# Altium PCB PMS_board.PcbDoc
Units mm, origin at the board's own origin, x right, y up, seen from the top; angles counter-clockwise.
Board outline 135 x 155 mm, 2 copper layers (Top Layer, Bottom Layer), stack 1.671 mm thick; 128 components, 74 nets, 436 pads, 62 vias.
Unrouted connection lines stored in the file: 1.
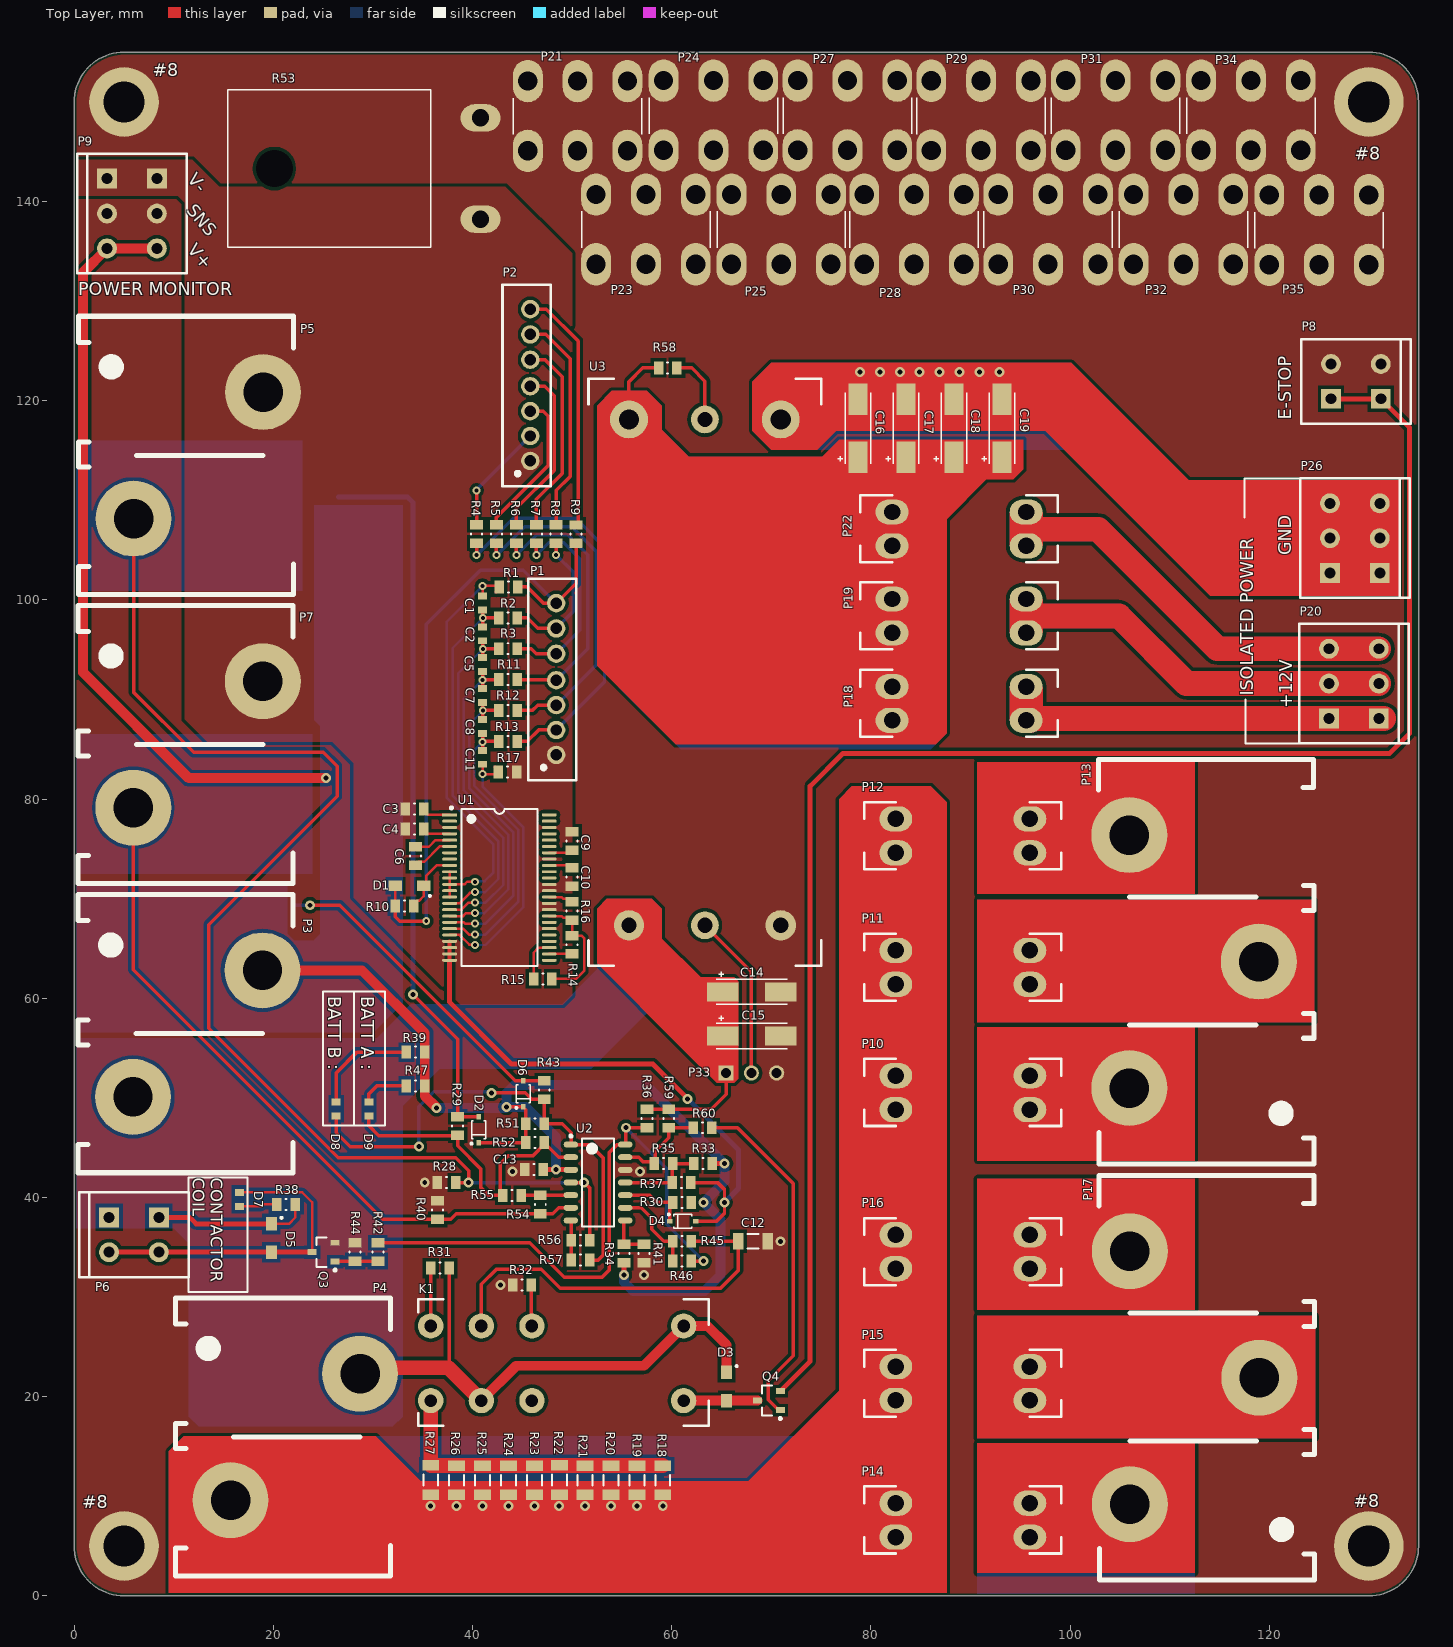
[diagram p0: Top Layer view]
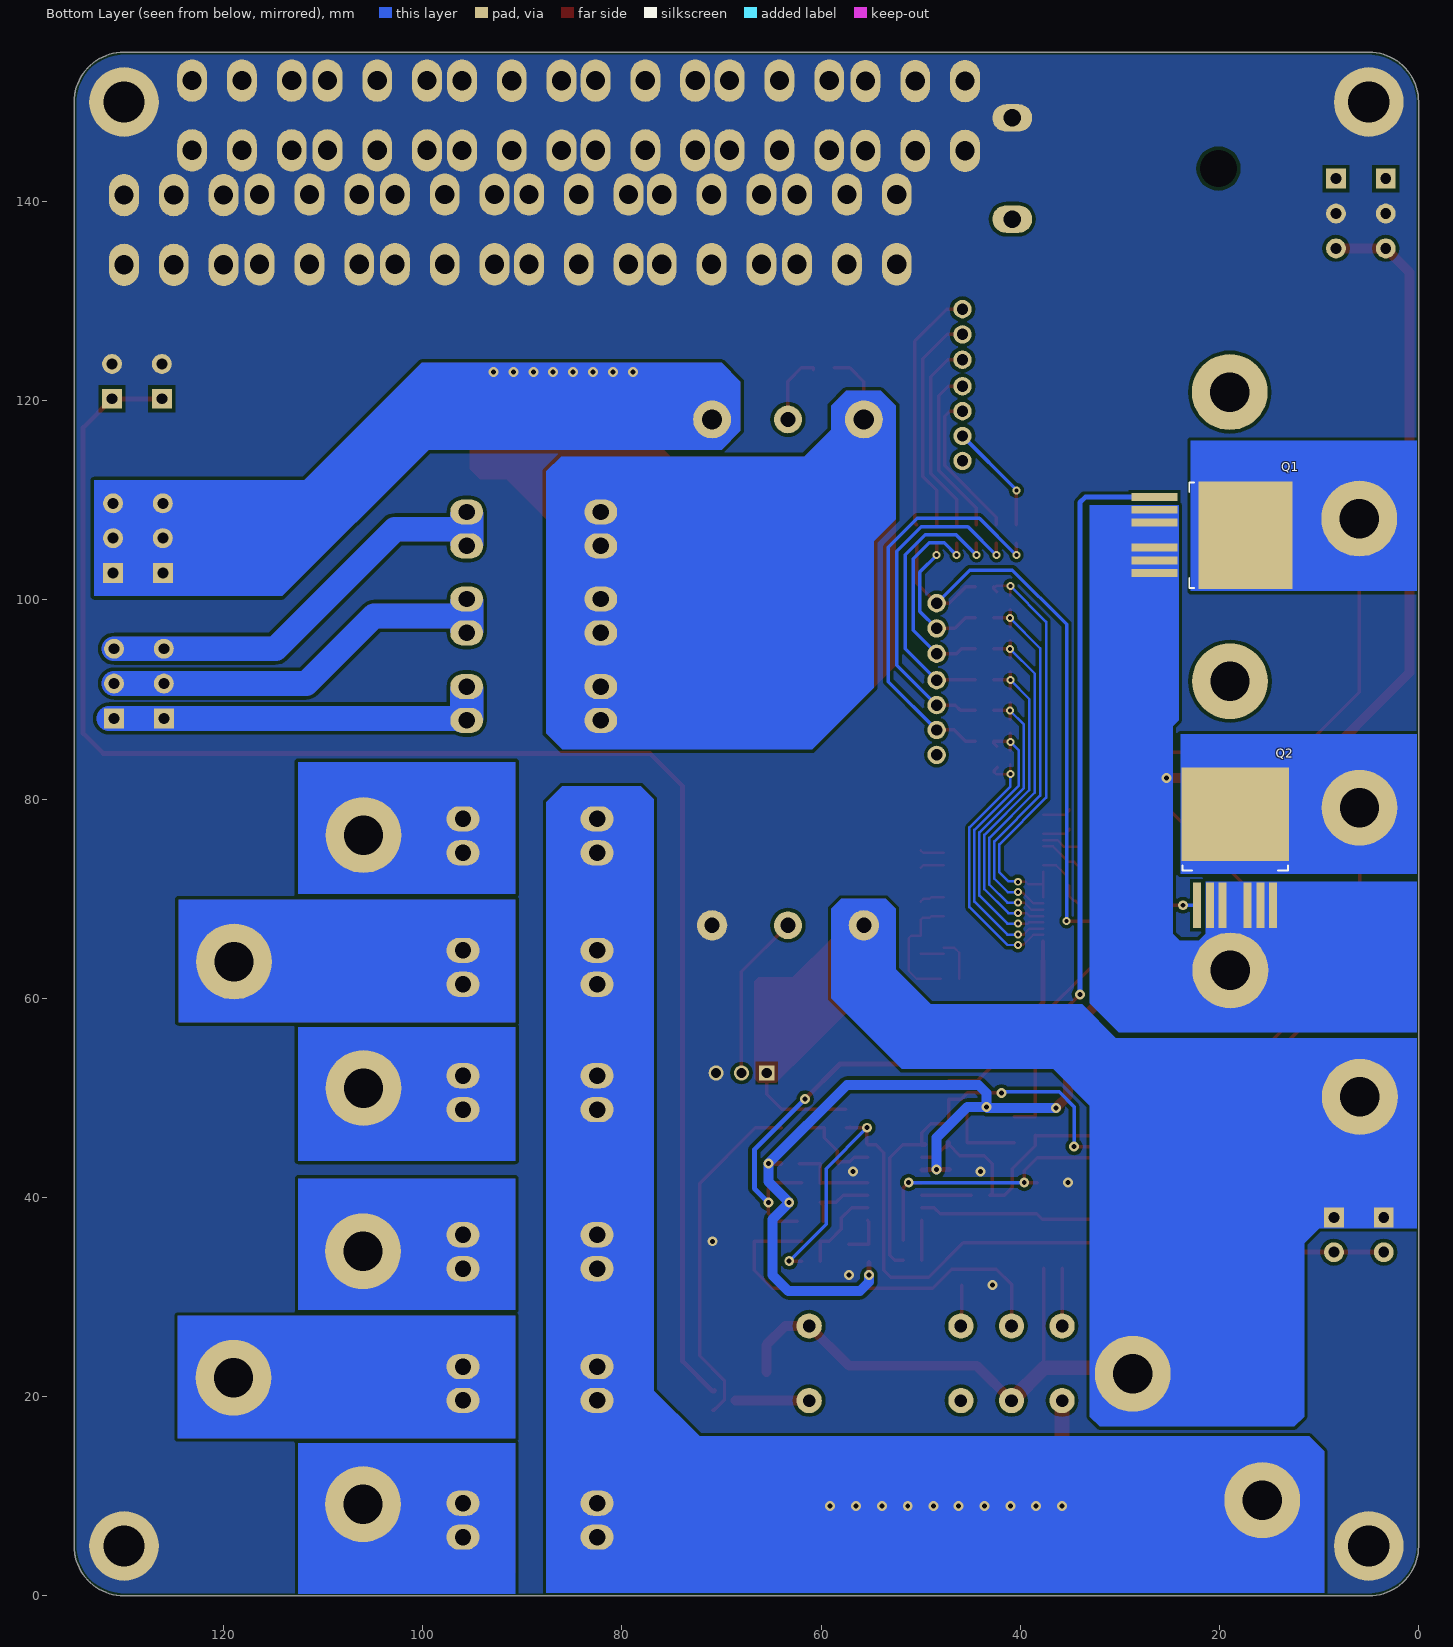
[diagram p1: Bottom Layer view, seen from below]

## Layer stack, top to bottom
Top Solder: solder mask 0.0102, Solder Resist, Dk 3.5
Top Layer: signal copper 0.0356
Dielectric 1: dielectric 1.6, FR-4, Dk 4.8
Bottom Layer: signal copper 0.0356
Bottom Solder: solder mask 0.0102, Solder Resist, Dk 3.5

## Board outline
0,5 0,150 cw(c5,150) 5,155 130,155 cw(c130,150) 135,150 135,5 cw(c130,5) 130,0 5,0 cw(c5,5)

## Design rules (kind name [scope] priority, off if disabled: settings)
BoardOutlineClearance [All] p1: gap=0.254 ignorepadtopadclearanceinfootprint=FALSE except(0: Arc-SplitContinuation Track-SplitContinuation SMDPad-SplitContinuation THPad-SplitContinuation Via-SplitContinuation Fill-SplitContinuation Poly-SplitContinuation Region-SplitContinuation Text-SplitContinuation)
Clearance [All] p1: gap=0.35 ignorepadtopadclearanceinfootprint=FALSE except(0: Arc-Hole Track-Hole SMDPad-Hole THPad-Hole Via-Hole Fill-Hole Poly-Hole Region-Hole Text-Hole; 0.25: Arc-Arc Arc-Track Arc-SMDPad Arc-Via Track-Track Track-SMDPad Track-Via SMDPad-SMDPad SMDPad-Via THPad-Via Via-Via)
PolygonConnect PolygonConnect_HighCurrent [InNetClass('HighCurrent')] p1: connectstyle=Direct reliefconductorwidth=0.254 reliefentries=4 polygonreliefangle="90 Angle" airgapwidth=0.254
PolygonConnect [All] p2: thpad.connectstyle=Relief thpad.reliefconductorwidth=0.45 thpad.reliefentries=4 thpad.polygonreliefangle="90 Angle" thpad.airgapwidth=0.254 smdpad.connectstyle=Direct smdpad.reliefconductorwidth=0.254 smdpad.reliefentries=4 smdpad.polygonreliefangle="90 Angle" smdpad.airgapwidth=0.254 via.connectstyle=Direct via.reliefconductorwidth=0.254 via.reliefentries=4 via.polygonreliefangle="90 Angle" via.airgapwidth=0.254
RoutingVias [All] p1: holewidth=0.711 width=1.27 viastyle="Through Hole" minholewidth=0.711 minwidth=1.27 maxholewidth=0.711 maxwidth=1.27
SolderMaskExpansion [All] p1: expansion=0.102
Width [All] p1: maxlimit=500 minlimit=0.15 preferedwidth=0.254 minimp=50.000000 maximp=50.000000 favimp=50.000000
30 further rules are at their usual default settings.

## Classes and differential pairs
net class HighCurrent: 24V BATT+ BATT- DGND GND V_BATT_A V_BATT_B VBUS
component class power_output_SCH3: C14 C15 C16 C17 C18 C19 P10 P11 P12 P13 P14 P15 P16 P17 P18 P19 P20 P21 P22 P23 P24 P25 P26 P27 P28 P29 P30 P31 P32 P33 P34 P35 R58 U3
component class power_input_SCH1: C12 C13 D2 D3 D4 D5 D6 D7 D8 D9 K1 P3 P4 P5 P6 P7 P8 P9 Q1 Q2 Q3 Q4 R18 R19 R20 R21 R22 R23 R24 R25 R26 R27 R28 R29 R30 R31 R32 R33 R34 R35 R36 R37 R38 R39 R40 R41 R42 R43 R44 R45 R46 R47 R51 R52 R53 R54 R55 R56 R57 R59 R60 U2
component class battery_manager_SCH2: C1 C2 C3 C4 C5 C6 C7 C8 C9 C10 C11 D1 P1 P2 R1 R2 R3 R4 R5 R6 R7 R8 R9 R10 R11 R12 R13 R14 R15 R16 R17 U1

## Components (designator, comment, footprint, x,y, rotation, side; value= is the part's Value field where it differs from the comment)
C1 "cap_single_np" chip_0603 41,99.7 r270 top
C2 "cap_single_np" chip_0603 41,96.6 r270 top
C3 "cap_single_np" chip_0805 34.175,79 r180 top
C4 "cap_single_np" chip_0805 34.175,77 r0 top
C5 "cap_single_np" chip_0603 41,93.5 r270 top
C6 "cap_single_np" chip_0805 34.25,74.275 r270 top
C7 "cap_single_np" chip_0603 41,90.4 r270 top
C8 "cap_single_np" chip_0603 41,87.3 r270 top
C9 "cap_single_np" chip_0805 50,75.775 r90 top
C10 "cap_single_np" chip_0805 50,72.175 r270 top
C11 "cap_single_np" chip_0603 41,84.2 r270 top
C12 "cap_single_np" chip_1206 68.175,35.6 r0 top
C13 "cap_single_np" chip_0805 46.175,42.8 r0 top
C14 "cap_single_p" chip_2917 68.028,60.649 r0 top
C15 "cap_single_p" chip_2917 68.028,56.204 r0 top
C16 "cap_single_p" chip_2917 78.695,117.237 r90 top
C17 "cap_single_p" chip_2917 83.521,117.237 r90 top
C18 "cap_single_p" chip_2917 88.347,117.237 r90 top
C19 "cap_single_p" chip_2917 93.173,117.237 r90 top
D1 "diode_2" sod123_0 33.675,71.3 r180 top
D2 "diode_1" sod323_0 40.6,46.8 r90 top
D3 "diode_2" sod123_0 65.5,21.025 r270 top
D4 "diode_1" sod323_0 61.1,37.6 r0 top
D5 "diode_2" sod123_0 19.8,35.925 r270 top
D6 "diode_1" sod323_0 45.1,50.4 r90 top
D7 "diode_4" chip_0603 16.6,39.8 r270 top
D8 "diode_4" chip_0603 26.3,48.9 r90 top
D9 "diode_4" chip_0603 29.6,48.9 r90 top
K1 "relay_dpdt" RELAY_SHRACK_RT2 61.2,19.6 r180 top
P1 "conn-7x1_0" JST_XH_7_0 48.4,84.44 r90 top
P2 "conn-7x1_0" JST_XH_7_0 45.8,113.96 r90 top
P3 "conn-2x1_0" BARR_0.5IN_2x1_0 18.905,62.8 r270 top
P4 "conn-2x1_0" BARR_0.5IN_2x1_0 28.705,22.3 r270 top
P5 "conn-2x1_0" BARR_0.5IN_2x1_0 18.963,120.867 r270 top
P6 "conn-2x1_0" TERM_3.50MM_2x1_0 3.5,38 r270 top
P7 "conn-2x1_0" BARR_0.5IN_2x1_0 18.939,91.833 r270 top
P8 "conn-2x1_0" TERM_3.50MM_2x1_0 131.2,120.2 r90 top
P9 "conn-3x1_0" TERM_3.50MM_3x1_0 3.3,142.3 r270 top
P10 "conn-fuse-holder_0" FUSE_HOLDER_KEYSTONE_3557-2 82.5,48.824 r0 top
P11 "conn-fuse-holder_0" FUSE_HOLDER_KEYSTONE_3557-2 82.5,61.397 r0 top
P12 "conn-fuse-holder_0" FUSE_HOLDER_KEYSTONE_3557-2 82.5,74.605 r0 top
P13 "conn-3x1_0" BARR_0.5IN_3x1_0 105.949,50.983 r90 top
P14 "conn-fuse-holder_0" FUSE_HOLDER_KEYSTONE_3557-2 82.5,5.898 r0 top
P15 "conn-fuse-holder_0" FUSE_HOLDER_KEYSTONE_3557-2 82.5,19.614 r0 top
P16 "conn-fuse-holder_0" FUSE_HOLDER_KEYSTONE_3557-2 82.5,32.847 r0 top
P17 "conn-3x1_0" BARR_0.5IN_3x1_0 106,9.2 r90 top
P18 "conn-fuse-holder_0" FUSE_HOLDER_KEYSTONE_3557-2 82.124,87.9 r0 top
P19 "conn-fuse-holder_0" FUSE_HOLDER_KEYSTONE_3557-2 82.124,96.688 r0 top
P20 "conn-3x1_0" TERM_3.50MM_3x1_0 131,88.1 r90 top
P21 "conn-1x1_0" KEYSTONE_7798 50.55,145.15 r180 top
P22 "conn-fuse-holder_0" FUSE_HOLDER_KEYSTONE_3557-2 82.124,105.426 r0 top
P23 "conn-1x1_0" KEYSTONE_7798 57.408,133.755 r180 top
P24 "conn-1x1_0" KEYSTONE_7798 64.186,145.2 r180 top
P25 "conn-1x1_0" KEYSTONE_7798 70.997,133.755 r180 top
P26 "conn-3x1_0" TERM_3.50MM_3x1_0 131.1,102.7 r90 top
P27 "conn-1x1_0" KEYSTONE_7798 77.648,145.2 r180 top
P28 "conn-1x1_0" KEYSTONE_7798 84.332,133.755 r180 top
P29 "conn-1x1_0" KEYSTONE_7798 91.063,145.185 r180 top
P30 "conn-1x1_0" KEYSTONE_7798 97.794,133.755 r180 top
P31 "conn-1x1_0" KEYSTONE_7798 104.572,145.2 r180 top
P32 "conn-1x1_0" KEYSTONE_7798 111.383,133.755 r180 top
P33 "conn-3x1_0" hddr_3x1_0 45.14,41.07 r0 top
P34 "conn-1x1_0" KEYSTONE_7798 118.161,145.2 r180 top
P35 "conn-1x1_0" KEYSTONE_7798 125,133.7 r180 top
Q1 "p-mosfet_4" PG-TO263-7-3 26.532,106.516 r270 bottom
Q2 "p-mosfet_4" PG-TO263-7-3 18.431,69.348 r180 bottom
Q3 "npn-bjt_0" sot-23-3 25.05,34.5 r180 top
Q4 "npn-bjt_0" sot-23-3 69.75,19.6 r180 top
R1 "res_single" chip_0805 43.6,101.3 r0 top
R2 "res_single" chip_0805 43.575,98.2 r0 top
R3 "res_single" chip_0805 43.575,95.1 r0 top
R4 "res_single" chip_0805 40.4,106.625 r90 top
R5 "res_single" chip_0805 42.4,106.625 r90 top
R6 "res_single" chip_0805 44.4,106.625 r90 top
R7 "res_single" chip_0805 46.4,106.625 r90 top
R8 "res_single" chip_0805 48.4,106.625 r90 top
R9 "res_single" chip_0805 50.4,106.6 r90 top
R10 "res_single" chip_0805 33.175,69.25 r180 top
R11 "res_single" chip_0805 43.575,92 r0 top
R12 "res_single" chip_0805 43.575,88.9 r0 top
R13 "res_single" chip_0805 43.575,85.8 r0 top
R14 "res_single" chip_0805 50,65.375 r270 top
R15 "res_single" chip_0805 47.05,61.95 r180 top
R16 "res_single" chip_0805 50,68.775 r270 top
R17 "res_single" chip_0805 43.525,82.7 r0 top
R18 "res_single" chip_1206 59.1,11.6 r270 top
R19 "res_single" chip_1206 56.5,11.6 r270 top
R20 "res_single" chip_1206 53.9,11.6 r270 top
R21 "res_single" chip_1206 51.3,11.6 r270 top
R22 "res_single" chip_1206 48.739,11.625 r270 top
R23 "res_single" chip_1206 46.2,11.6 r270 top
R24 "res_single" chip_1206 43.6,11.6 r270 top
R25 "res_single" chip_1206 41,11.6 r270 top
R26 "res_single" chip_1206 38.4,11.6 r270 top
R27 "res_single" chip_1206 35.8,11.625 r270 top
R28 "res_single" chip_0805 37.375,41.5 r0 top
R29 "res_single" chip_0805 38.5,47.175 r270 top
R30 "res_single" chip_0805 61.025,39.5 r0 top
R31 "res_single" chip_0805 36.725,32.9 r0 top
R32 "res_single" chip_0805 44.975,31.2 r180 top
R33 "res_single" chip_0805 63.125,43.4 r180 top
R34 "res_single" chip_0805 55.2,34.375 r90 top
R35 "res_single" chip_0805 59.175,43.4 r180 top
R36 "res_single" chip_0805 57.5,47.925 r90 top
R37 "res_single" chip_0805 61,41.5 r0 top
R38 "res_single" chip_0805 21.275,39.3 r0 top
R39 "res_single" chip_0805 34.275,54.6 r180 top
R40 "res_single" chip_0805 36.5,38.725 r90 top
R41 "res_single" chip_0805 57.2,34.375 r270 top
R42 "res_single" chip_0805 30.5,34.525 r270 top
R43 "res_single" chip_0805 47.2,50.775 r270 top
R44 "res_single" chip_0805 28.2,34.525 r90 top
R45 "res_single" chip_0805 61.025,35.6 r180 top
R46 "res_single" chip_0805 61.025,33.6 r0 top
R47 "res_single" chip_0805 34.275,51.2 r0 top
R51 "res_single" chip_0805 46.275,47.4 r0 top
R52 "res_single" chip_0805 46.275,45.5 r0 top
R53 "res_single" TO-247-2-H 40.8,143.32 r90 top
R54 "res_single" chip_0805 46.8,39.275 r90 top
R55 "res_single" chip_0805 43.975,40.2 r180 top
R56 "res_single" chip_0805 50.825,35.7 r180 top
R57 "res_single" chip_0805 50.825,33.7 r0 top
R58 "res_single" chip_0805 59.6,123.3 r180 top
R59 "res_single" chip_0805 59.7,47.925 r90 top
R60 "res_single" chip_0805 63.1,47 r180 top
U1 "BQ77PL900" SSOP-48_0 37.7,78.42 r0 top
U2 "LM339" so-14 52.6,41.5 r0 top
U3 "eighth_brick_module_6" EIGHTH_BRICK_6_0 63.328,92.726 r90 top

## Footprints (in the part's own frame and the unit in brackets; to place one, negate y for a bottom-side part, rotate by r counter-clockwise, add the part's x,y. Pads: shape width x height; smd on the part's side, far side on the other; paste and mask are expansions set on the pad)
BARR_0.5IN_2x1_0 [mm] "Barrier Block, 0.5\" Pitch, 2 Pos, 1 Level, Molex 38969"
  round 7.62 hole 3.96: 1(0,0) 2(12.7,-13.005)
  silkscreen extent -7.62,-18.54 20.32,3.05, body extent -7.6,-18.55 20.3,3.05, height 22.6
BARR_0.5IN_3x1_0 [mm] "Molex 0389690003 connector"
  round 7.62 hole 3.96: 1(0,0) 2(12.7,-13.005) 3(25.4,0)
  silkscreen extent -7.62,-18.54 33,3.09, body extent -7.62,-18.54 33.02,3.05, height 22.61
chip_0603 [mm]
  rect 0.7x0.9 smd: 1(-0.7,0) 2(0.7,0)
  body extent -0.85,-0.45 0.85,0.45, height 0.6
chip_0805 [mm]
  rect 0.95x1.3 smd: 1(-0.925,0) 2(0.925,0)
  silkscreen extent -0.05,-0.55 0.05,0.55, body extent -1.05,-0.65 1.05,0.65, height 0.6
chip_1206 [mm]
  rect 1.05x1.7 smd: 1(-1.475,0) 2(1.475,0)
  silkscreen extent -0.55,-0.75 0.55,0.75, body extent -1.65,-0.85 1.65,0.85, height 0.6
chip_2917 [mil]
  rect 125x75 smd: 1(-115,0) 2(115,0)
  silkscreen extent -140,-50 140,80, body extent -140,-47 140,47, height 118
EIGHTH_BRICK_6_0 [mil] "Eighth-Brick Power Module, 6-pin"
  round 120 hole 60: 1(-1000,300) 3(-1000,-300)
  round 110 hole 60: 2(-1000,0) 6(1000,0)
  round 150 hole 80: 4(1000,-300) 8(1000,300)
  silkscreen extent -1160,-460 1160,460, body extent -1150,-453 1150,453, height 380
FUSE_HOLDER_KEYSTONE_3557-2 [mil]
  oval 130x100 hole 65: 1(0,0) 1(0,134) 2(530,0) 2(530,134)
  Multi-Layer region: -65,134 -65,0 64,0 65,0 65,134
  Multi-Layer region: 465,134 465,0 594,0 595,0 595,134
  silkscreen extent -125,-65 655,200
hddr_3x1_0 [mil] "0.1\" Header 3x1"
  rect 60x60 hole 40: 1(800,450)
  round 60 hole 40: 2(900,450) 3(1000,450)
JST_XH_7_0 [mm]
  round 1.85 hole 1.15: 1(0,0) 2(2.5,0) 3(5,0) 4(7.5,0) 5(10.16,0) 6(12.7,0) 7(15.24,0)
  silkscreen extent -2.54,-2.03 17.7,2.79
KEYSTONE_7798 [mm] "Screw Terminal"
  oval 3x4.25 hole 1.93: 1(-5,0.05) 1(-5,-6.95) 1(0,0.05) 1(0,-6.95) 1(5,0.05) 1(5,-6.95)
  silkscreen extent -6.45,-5.25 6.45,-1.6, body extent -6.44,-7.89 6.44,0.95, height 6.35
PG-TO263-7-3 [mm] "Power Transistor Package"
  rect 0.8x4.6 smd: 1(-3.81,0) 2(-2.54,0) 3(-1.27,0) 5(1.27,0) 6(2.54,0) 7(3.81,0)
  rect 10.8x9.4 smd: 4(0,9.15)
  silkscreen extent -5.3,3.5 5.3,4, body extent -5.3,3.5 5.3,13.8, height 4.4
RELAY_SHRACK_RT2 [mil]
  round 100 hole 50: 1(0,0) 2(0,-295) 3(800,0) 4(600,0) 5(1000,0) 6(800,-295) 7(600,-295) 8(1000,-295)
  silkscreen extent -100,-400 1050,100, body extent -99,-402 1051,99, height 630
so-14 [mm] "SOIC, 14-Leads, Body 8.65x3.90mm, Pitch 1.27mm, IPC Medium Density"
  oval 1.45x0.6 smd: 1(-2.725,3.81) 2(-2.725,2.54) 3(-2.725,1.27) 4(-2.725,0) 5(-2.725,-1.27) 6(-2.725,-2.54) 7(-2.725,-3.81) 8(2.725,-3.81) 9(2.725,-2.54) 10(2.725,-1.27) 11(2.725,0) 12(2.725,1.27) 13(2.725,2.54) 14(2.725,3.81)
  silkscreen extent -2.85,-4.4 1.6,4.78, body extent -3.08,-4.4 3.08,4.41, height 2
sod123_0 [mm] "SOD123, 1.65mm x 2.70mm"
  rect 1.35x1.1 smd: 1(-1.425,0) 2(1.425,0)
  silkscreen extent -2.13,0.92 -1.93,1.12, body extent -1.45,-0.9 1.45,0.9, height 1
sod323_0 [mm] "SOD-323, 1.25mm x 1.7mm"
  rect 0.55x0.45 smd: 1(-1.3,0) 2(1.3,0)
  silkscreen extent -1.5,-0.7 0.9,0.8, body extent -0.9,-0.67 0.9,0.67, height 1
sot-23-3 [mm] "SOT-23-3 package"
  rect 0.9x0.6 smd: 1(-1.15,0.95) 2(-1.15,-0.95) 3(1.15,0)
  silkscreen extent -1.28,-1.5 0.7,1.92, body extent -1.42,-1.5 1.42,1.5, height 1.2
SSOP-48_0 [mm]
  rect 1.5x0.3 smd: 1(0,0)
  oval 1.5x0.3 smd: 2(0,-0.635) 3(0,-1.27) 4(0,-1.905) 5(0,-2.54) 6(0,-3.175) 7(0,-3.81) 8(0,-4.445) 9(0,-5.08) 10(0,-5.715) 11(0,-6.35) 12(0,-6.985) 13(0,-7.62) 14(0,-8.255) 15(0,-8.89) 16(0,-9.525) 17(0,-10.16) 18(0,-10.795) 19(0,-11.43) 20(0,-12.065) 21(0,-12.7) 22(0,-13.335) 23(0,-13.97) 24(0,-14.605) 25(10,-14.605) 26(10,-13.97) 27(10,-13.335) 28(10,-12.7) 29(10,-12.065) 30(10,-11.43) 31(10,-10.795) 32(10,-10.16) 33(10,-9.525) 34(10,-8.89) 35(10,-8.255) 36(10,-7.62) 37(10,-6.985) 38(10,-6.35) 39(10,-5.715) 40(10,-5.08) 41(10,-4.445) 42(10,-3.81) 43(10,-3.175) 44(10,-2.54) 45(10,-1.905) 46(10,-1.27) 47(10,-0.635) 48(10,0)
  silkscreen extent 0.05,-15.2 8.8,0.82, body extent 1.2,-15.2 8.8,0.6, height 2.54
TERM_3.50MM_2x1_0 [mm] "Terminal Block, 3.5mm pitch"
  rect 2x2 hole 1.1: 1(0,5) 1(0,0)
  round 2 hole 1.1: 2(3.5,5) 2(3.5,0)
  silkscreen extent -2.5,-3 6,8, body extent -2.5,-3 6,8, height 8.98
TERM_3.50MM_3x1_0 [mm]
  rect 2x2 hole 1.1: 1(0,5) 1(0,0)
  round 2 hole 1.1: 2(3.5,5) 2(3.5,0) 3(7,5) 3(7,0)
  silkscreen extent -2.5,-3 9.5,8, body extent -2.5,-3 9.5,8, height 8.98
TO-247-2-H [mm] "TO-247 board mounted"
  round 0 hole 3.7: 0(0,20.7)
  oval 2.75x4 hole 1.75: 1(-5.08,0) 2(5.08,0)
  silkscreen extent -7.9,5 7.9,25.4, body extent -7.75,-0.35 7.75,25.25, height 5

## Part data
C1 C2 C5 C7 C8 C11: library part CAP-00542, "CAP, 0.1uF, ±10%, 16V, X7R, 0603", Capacitance=0.1uF, Manufacturer=Murata, Tolerance=±10%, Voltage Rating=16V, Part Number=CAP-00542, Type=X7R
C3: library part CAP-00127, "CAP, 4.7uF, 10%, 16V, X7R, 0805", Capacitance=4.7uF, Manufacturer=Murata, Manufacturer PN=GRM21BR71C475KA73L, Tolerance=10%, Voltage Rating=16V, Part Number=CAP-00127, Type=X7R
C4 C6: library part CAP-00107, "CAP, 1uF, 10%, 16V, X7R, 0805", Capacitance=1uF, Manufacturer=Murata, Manufacturer PN=GRM21BR71C105KA01L, Tolerance=10%, Voltage Rating=16V, Part Number=CAP-00107, Type=X7R
C9 C10: library part CAP-00117, "CAP, 2.2uF, 10%, 16V, X7R, 0805", Capacitance=2.2uF, Manufacturer=Murata, Manufacturer PN=GRM21BR71C225KA12L, Tolerance=10%, Voltage Rating=16V, Part Number=CAP-00117, Type=X7R
C12: library part CAP-00539, "CAP, 10uF, ±10%, 25V, X7R, 1206", Capacitance=10uF, Manufacturer=Samsung, Manufacturer PN=CL31B106KAHNNNE, Tolerance=±10%, Voltage Rating=25V, Part Number=CAP-00539, Type=X7R
C13: library part CAP-00109, "CAP, 1uF, 10%, 50V, X7R, 0805", Capacitance=1uF, Manufacturer=Murata, Manufacturer PN=GRM21BR71H105KA12L, Tolerance=10%, Voltage Rating=50V, Part Number=CAP-00109, Type=X7R
C14 C15: library part CAP-00552, "CAP, 47uF, ±10%, 35V, Tantalum, 2917", Capacitance=47uF, Manufacturer=KEMET, Manufacturer PN=T495X476K035ATE300, Tolerance=±10%, Voltage Rating=35V, Cost=$2.41, Part Number=CAP-00552, Type=Tantalum
C16 C17 C18 C19: library part CAP-00550, "CAP, 100uF, ±10%, 16V, Tantalum, 2917", Capacitance=100uF, Manufacturer=AVX, Manufacturer PN=TAJD107K016RNJ, Tolerance=±10%, Voltage Rating=16V, Cost=$0.94, Part Number=CAP-00550, Type=Tantalum
D1 D3 D5: library part DIO-00001, "Dio Shtky, 1A, 0.55V, 40V, SOD-123", Current Rating=1A, Forward Voltage=550mV, Manufacturer="ON Semi", Manufacturer PN=MBR140SFT1G, Reverse Breakdown Voltage=40V, Part Number=DIO-00001, Type=Schottky
D2 D4 D6: library part DIO-00019, "Dio Zen, 10V, 2%, 200mW, SOD-323", Forward Voltage=900mV, Manufacturer="ON Semi", Manufacturer PN=MM3Z10VST1G, Power Rating=200mW, Reverse Breakdown Voltage=10V, Tolerance=2%, Part Number=DIO-00019, Type=Zener
D7 D8 D9: library part DIO-00050, "LED, Green, 0603, Low current, HELI2 Series", Current Rating=30mA, Forward Voltage=2.65V, Manufacturer=Kingbright, Manufacturer PN=APT1608LZGCK, Power Rating=120mW, Reverse Breakdown Voltage=5V, Cost=0.58, Part Number=DIO-00050, Type=LED
K1: library part MISC-00005, "Relay 24V, 8A, DPDT", Contact Current Rating=*A, Manufacturer="TE Connectivity", Manufacturer PN=RTE24024, Cost=3.12, Part Number=MISC-00005
P1 P2: library part CONN-00036, "JST XH 7x1, THT", Current=3, Manufacturer=JST, Manufacturer PN=B7B-XH-A, Levels=1, Part Number=CONN-00036, Positions per level=7, Type=Thru-hole
P3 P4 P5 P7: library part CONN-00001, "Barrier Blk, 2 Pos, 50 A", Current=50, Manufacturer=Molex, Manufacturer PN=389690002, Cost=1.68, Levels=1, Part Number=CONN-00001, Positions per level=2, Type="Barrier Block"
P6 P8: library part CONN-00023, "Term Blk, 2 Pos, 16A, 3.5mm Pitch", Current=16, Manufacturer="Phoenix Contact", Manufacturer PN=1861933, Cost=0.79, Levels=1, Part Number=CONN-00023, Positions per level=2, Type="Terminal Block"
P9 P20 P26: library part CONN-00022, "Term Blk, 3 Pos, 16A, 3.5mm Pitch", Current=16, Manufacturer="Phoenix Contact", Manufacturer PN=1861946, Cost=1.19, Levels=1, Part Number=CONN-00022, Positions per level=3, Type="Terminal Block"
P10 P11 P12 P14 P15 P16 P18 P19 P22: library part CONN-00015, "Fuse Holder, 30A, 500V, LP-Mini 897, ATOF 257", Current=30, Manufacturer="Keystone Electronics", Manufacturer PN=3357-02, Cost=0.98, Levels=1, Part Number=CONN-00015, Positions per level=2
P13 P17: library part CONN-00033, "Barrier Blk, 3 Pos, 50 A", Current=50, Manufacturer=Molex, Manufacturer PN=389690003, Cost=2.96, Levels=1, Part Number=CONN-00033, Positions per level=3, Type="Barrier Block"
P21 P23 P24 P25 P27 P28 P29 P30 P31 P32 P34 P35: library part CONN-00042, "Screw Terminal, M4, 30A", Manufacturer=Keystone, Manufacturer PN=7798, Cost=0.5, Levels=1, Part Number=CONN-00042, Positions per level=1, Type="Screw Terminal"
P33: library part CONN-00037, "Header, 3x1, 0.1\"", Levels=1, Part Number=CONN-00037, Positions per level=3, Type=Header
Q1 Q2: library part XSTR-00027, "XSTR PFET, 180A, 40V, Vgs 1.7V, PG-TO263-7-3", Manufacturer=Infineon, Manufacturer PN=IPB180P04P4L02ATMA1, Max Current=180A, Max Power=150W, Max Voltage=40V, Cost=2.99, Part Number=XSTR-00027, Type=PFET, Vgs/Vce=1.7V
Q3 Q4: library part XSTR-00021, "XSTR NPN, 2A, 100V, Vce 0.15V, SOT-23", Manufacturer="ON Semi", Manufacturer PN=NSS1C201LT1G, Max Current=2A, Max Power=490mW, Max Voltage=100V, Cost=0.48, Part Number=XSTR-00021, Type=NPN, Vgs/Vce=0.15V
R1 R2 R3 R11 R12 R13 R17: library part RES-00250, "RES SMD 680 OHM 1% 1/8W 0805", Manufacturer="Rohm Semiconductor", Manufacturer PN=KTR10EZPF6800, Power Rating=0.125W, Resistance=680, Tolerance=1%, Part Number=RES-00250
R4 R5 R6 R7 R8 R9: library part RES-00183, "RES SMD 120 OHM 1% 1/8W 0805", Manufacturer="Rohm Semiconductor", Manufacturer PN=KTR10EZPF1200, Power Rating=0.125W, Resistance=120, Tolerance=1%, Part Number=RES-00183
R10 R30 R45: library part RES-00361, "RES SMD 1K OHM 1% 1/8W 0805", Manufacturer="Rohm Semiconductor", Manufacturer PN=KTR10EZPF1001, Power Rating=0.125W, Resistance=1k, Tolerance=1%, Part Number=RES-00361
R14 R15 R16 R29 R38 R39 R43 R47 R51 R52 R54 R56: library part RES-00307, "RES SMD 10K OHM 1% 1/8W 0805", Manufacturer="Rohm Semiconductor", Manufacturer PN=KTR10EZPF1002, Power Rating=0.125W, Resistance=10k, Tolerance=1%, Part Number=RES-00307
R18 R19 R20 R21 R22 R23 R24 R25 R26 R27: library part RES-00595, "RES SMD 100 OHM 1% 1/2W 1206", Power Rating=0.5W, Resistance=100, Tolerance=1%, Part Number=RES-00595
R28 R33 R40 R41: library part RES-00302, "RES SMD 100K OHM 1% 1/8W 0805", Manufacturer="Rohm Semiconductor", Manufacturer PN=KTR10EZPF1003, Power Rating=0.125W, Resistance=100k, Tolerance=1%, Part Number=RES-00302
R31 R34: library part RES-00391, "RES SMD 22K OHM 1% 1/8W 0805", Manufacturer="Rohm Semiconductor", Manufacturer PN=KTR10EZPF2202, Power Rating=0.125W, Resistance=22k, Tolerance=1%, Part Number=RES-00391
R32: library part RES-00117, "RES SMD 10 OHM 1% 1/8W 0805", Manufacturer="Rohm Semiconductor", Manufacturer PN=KTR10EZPF10R0, Power Rating=0.125W, Resistance=10, Tolerance=1%, Part Number=RES-00117
R35 R46 R55 R57: library part RES-00363, "RES SMD 1M OHM 1% 1/8W 0805", Manufacturer="Rohm Semiconductor", Manufacturer PN=KTR10EZPF1004, Power Rating=0.125W, Resistance=1M, Tolerance=1%, Part Number=RES-00363
R36 R42 R44 R59 R60: library part RES-00414, "RES SMD 2K OHM 1% 1/8W 0805", Manufacturer="Rohm Semiconductor", Manufacturer PN=KTR10EZPF2001, Power Rating=0.125W, Resistance=2k, Tolerance=1%, Part Number=RES-00414
R37: library part RES-00319, "RES SMD 120K OHM 1% 1/8W 0805", Manufacturer="Rohm Semiconductor", Manufacturer PN=KTR10EZPF1203, Power Rating=0.125W, Resistance=120k, Tolerance=1%, Part Number=RES-00319
R53: library part RES-00688, "RES THT 0.075 OHM 1% 100W TO-247-2 Board Mounted", Manufacturer=Caddock, Manufacturer PN=MP9100-0.075-1%, Power Rating=100W, Resistance=0.075, Tolerance=1%, Part Number=RES-00688
R58: library part RES-00461, "RES SMD 3M OHM 1% 1/8W 0805", Manufacturer="Rohm Semiconductor", Manufacturer PN=KTR10EZPF3004, Power Rating=0.125W, Resistance=3M, Tolerance=1%, Part Number=RES-00461
U1: library part PWREG-00024, "Batt Manager, Li-Ion, 5-10 cells, bq77PL900", Manufacturer=TI, Manufacturer PN=BQ77PL900DLR, Voltage Range In="-0.3 - 60V", Cost=6.36, Fixed/Adj=Fixed, Part Number=PWREG-00024, Reg Type="Batt Mngr"
U2: library part ANLG-00006, "Comp, Quad, LM339", Manufacturer=TI, Manufacturer PN=LM339, Part Number=ANLG-00006
U3: library part PWREG-00026, "Module, Isolated, Eighth-Brick, 12V, 10A, Positive Logic", Manufacturer=Murata, Manufacturer PN=UWE-12/10-Q48PB-C, Max Current=10A, Voltage Range In="18 - 75V", Voltage Range Out=12V, Cost=47, Fixed/Adj=Fixed, Part Number=PWREG-00026, Reg Type="Isolated Module"

## Free pads (board coordinates)
  round 7 hole 4.166: 0(5,5) 0(5,150) 0(130,5) 0(130,150)

## Via types
v1: diameter 1, hole 0.5, Top Layer to Bottom Layer, tented both sides, 41 vias
v2: diameter 0.8, hole 0.4, Top Layer to Bottom Layer, tented both sides, 21 vias

## Nets (pads, with @x,y where several pads share a name; then routed paths per layer and width w, separated by ;. In a path a pad name is that pad's centre, name@x,y a point inside that pad or via, vN(x,y) a via of type N, cw(c..) or ccw(c..) an arc to the next point about the centre after c; other vN are vias at no path point)
24V: C14.1 C15.1 D3.1 D5.1 K1.2 K1.3 P3.2 P4.1 P6.1 P33.1 R31.2 R36.2 R38.2 R59.2 U3.1 | length 81.3
  Top Layer w0.25: D5.1 21.55,37.35 22.2,38 R38.2
  Top Layer w0.35: 37.58,22.9 37.65,22.97 R31.2 ; R36.2 R59.2 63.95,48.85 65.46,50.36 P33.1
  Top Layer w0.5: P6.1@8.5,38 11.6,38 12.25,37.35 D5.1
  Top Layer w1: K1.3 44.38,23.1 57.207,23.1 K1.2 63.607,27.093 65.5,25.2 D3.1
  Top Layer w1.5: P4.1 29.305,22.9 37.58,22.9 K1.3
+12: C16.1 C17.1 C18.1 C19.1 P18.1 P19.1 P22.1 R58.2 U3.8 | length 7.3
  Top Layer w0.35: U3.8 55.708,121.908 57.1,123.3 R58.2
A_CELL_1: D1.2 P1.7 R1.2 R9.1 R10.2 | length 64.2
  Top Layer w0.25: R10.2 D1.2
  Top Layer w0.35: R10.2 32.25,68.2 32.7,67.75 v2(35.35,67.75) ; R1.2 45.5,101.3 47.12,99.68 P1.7 50.4,101.68 R9.1
  Bottom Layer w0.35: v2(35.35,67.75) 35.35,97.55 40.8,103 45.08,103 P1.7
A_CELL_2: P1.6 R2.2 R8.1 | length 14.3
  Top Layer w0.35: R2.2 45.5,98.2 46.56,97.14 P1.6 ; v2(48.4,104.5) R8.1
  Bottom Layer w0.35: P1.6 50.1,98.84 50.1,102.8 v2(48.4,104.5)
A_CELL_3: P1.5 R3.2 R7.1 | length 21.4
  Top Layer w0.35: R3.2 45.9,95.1 46.4,94.6 P1.5 ; v2(46.4,104.5) R7.1
  Bottom Layer w0.35: v2(46.4,104.5) 47.65,105.75 49.15,105.75 50.75,104.15 50.75,96.95 P1.5
A_CELL_4: P1.4 R6.1 R11.2 | length 27.9
  Top Layer w0.35: v2(44.4,104.5) R6.1 ; R11.2 48.34,92 P1.4
  Bottom Layer w0.35: v2(44.4,104.5) 46.45,106.55 49.55,106.55 51.55,104.55 51.55,95.09 P1.4
A_CELL_5: P1.3 R5.1 R12.2 | length 34.6
  Top Layer w0.35: v2(42.4,104.5) R5.1 ; R12.2 46,88.9 46.54,89.44 P1.3
  Bottom Layer w0.35: v2(42.4,104.5) 45.25,107.35 49.95,107.35 52.4,104.9 52.4,93.44 P1.3
A_CELL_6: P1.2 R4.1 R13.2 | length 41.5
  Top Layer w0.35: v2(40.4,104.5) R4.1 ; R13.2 45.5,85.8 46.64,86.94 P1.2
  Bottom Layer w0.35: v2(40.4,104.5) 44.1,108.2 50.35,108.2 53.25,105.3 53.25,91.79 P1.2
B_CELL_1: P2.7 R9.2 | length 24.7
  Top Layer w0.35: P2.7 47.4,129.2 50.6,126 50.6,107.725 R9.2
B_CELL_2: P2.6 R8.2 | length 22.2
  Top Layer w0.35: P2.6 47.34,126.66 49.8,124.2 49.8,112.4 48.4,111 R8.2
B_CELL_3: P2.5 R7.2 | length 19.8
  Top Layer w0.35: P2.5 47.28,124.12 49,122.4 49,112.7 46.4,110.1 R7.2
B_CELL_4: P2.4 R6.2 | length 17.3
  Top Layer w0.35: R6.2 44.4,109.2 48.2,113 48.2,120.5 47.24,121.46 P2.4
B_CELL_5: P2.3 R5.2 | length 15.1
  Top Layer w0.35: R5.2 42.4,108.3 47.6,113.5 47.6,118.45 47.09,118.96 P2.3
B_CELL_6: P2.2 R4.2 | length 11.1
  Top Layer w0.35: R4.2 v2(40.4,111)
  Bottom Layer w0.35: v2(40.4,111) 40.4,111.06 P2.2
BATT+: C13.2 D2.1 D6.1 P3.1 P9.3 Q1.2 Q1.3 Q1.5 Q1.6 Q1.7 Q2.2 Q2.3 Q2.5 Q2.6 Q2.7 R30.2 R33.1 R34.1 R39.1 R47.2 R51.1 R52.1 U2.3 | length 189.3
  Top Layer w0.35: P3.1 P3.1@20.273,64.168 ; D2.1 R52.1 R51.1 45.35,48.8 45.1,49.05 D6.1 v1(43.4,49.1)
  Top Layer w0.5: C13.2 v1(48.4,42.8) 49.393,42.8 49.423,42.77 U2.3 ; v1(55.2,32.2) R34.1 ; R33.1 v1(65.3,43.4)
  Top Layer w1: P9.3@8.3,135.3 3.3,135.3 0.9,132.9 0.9,92.7 11.5,82.1 v1(25.3,82.1) ; P3.1 28.9,62.8 35.2,56.5 35.2,50.2 v1(36.4,49)
  Bottom Layer w1: v1(36.4,49) 43.3,49 v1(43.4,49.1) ; v1(48.4,42.8) 48.4,46 45.3,49.1 v1(43.4,49.1) ; v1(55.2,32.2) 55.2,31.5 56.1,30.6 63.3,30.6 64.9,32.2 64.9,37.8 v1(63.2,39.5) 65.3,41.6 v1(65.3,43.4) 57.4,51.3 55.6,51.3 44.2,51.3 43.4,50.5 v1(43.4,49.1)
BATT-: C3.2 C4.1 C9.2 C10.2 D4.2 P1.1 P2.1 P5.1 P7.1 P9.1 R17.2 R37.2 R53.1 U1.3 U1.21 U1.22 U1.23 U1.24 U1.30 U1.33 U1.34 U1.36 U1.37 U1.41 U1.46 | length 56.4
  Top Layer w0.35: R37.2 64.6,41.5 65.3,40.8 v1(65.3,39.5) 65.3,38.4 64.5,37.6 D4.2
  Top Layer w0.4: U1.24 U1.23 U1.22 U1.21
  Top Layer w0.5: U1.24 37.7,59.6 43.9,53.4 58.1,53.4 v1(61.6,49.9)
  Bottom Layer w0.5: v1(61.6,49.9) 66.7,44.8 66.7,40.9 v1(65.3,39.5)
COIL_DRIVE: R36.1 R42.1 R46.2 U2.14 | length 60.4
  Top Layer w0.35: R42.1 45.75,35.45 49.2,32 53,32 53.704,32.704 53.704,44.504 54.472,45.272 55.287,45.272 U2.14 55.4,45.385 v1(55.4,47) R36.1 ; R36.1@57.09,47.035 R36.1@57.1,47.025 ; R46.2 v1(63.2,33.6)
  Bottom Layer w0.35: v1(55.4,47) 59.5,42.9 59.5,37.3 v1(63.2,33.6)
COIL_EN: Q4.1 R60.1 | length 35
  Top Layer w0.35: R60.1 66.6,47 72.2,41.4 72.2,24.1 69.7,21.6 69.7,19.7 70.75,18.65 Q4.1@70.804,18.65 ; Q4.1@70.679,18.775 Q4.1@70.804,18.65 ; Q4.1 Q4.1@70.804,18.65
DGND: C16.2 C17.2 C18.2 C19.2 P26.1 P26.2 P26.3 U3.4
  other v1: 78.9,122.9 80.9,122.9 82.9,122.9 84.9,122.9 86.9,122.9 88.9,122.9 90.9,122.9 92.9,122.9
E_STOP: P8.1 Q4.2 | length 164.4
  Top Layer w0.5: Q4.2@70.7,20.6 70.75,20.55 Q4.2 73.9,23.55 73.9,81.3 77.2,84.6 132.1,84.6 134.1,86.6 134.1,117.3 131.2,120.2 P8.1@126.2,120.2
GATE_A: D9.1 R29.2 R52.2 R55.2 U2.2 | length 31
  Top Layer w0.35: D9.1 29.6,47.2 30.6,46.2 38.45,46.2 R29.2 38.5,45.2 40.8,42.9 40.8,41 41.6,40.2 R55.2 42.8,40.45 42.8,43.4 43.6,44.2 46.075,44.2 R52.2@47.2,45.325 ; R52.2@47.425,45.1 47.6,45.1 48.66,44.04 U2.2
  Top Layer w0.5: R52.2 47.2,45.325 R52.2@47.425,45.1
GATE_B: D8.1 R43.2 R51.2 R57.2 U2.1 | length 50.3
  Top Layer w0.35: D8.1 26.3,46.5 27.7,45.1 v1(34.6,45.1) ; v1(41.9,50.5) 45.3,50.5 45.95,49.85 R43.2 R51.2 49,47.4 49.9,46.5 U2.1@49.9,45.335 ; U2.1 51.79,45.31 53.1,44 53.1,34.2 52.6,33.7 R57.2
  Top Layer w0.5: U2.1@49.574,45.31 U2.1 U2.1@49.9,45.335
  Bottom Layer w0.35: v1(34.6,45.1) 34.6,49.1 36.1,50.6 41.8,50.6 v1(41.9,50.5)
GND: C12.2 C13.1 C14.2 C15.2 P8.2 P9.2 P21.1 P23.1 P24.1 P25.1 P27.1 P28.1 P29.1 P30.1 P31.1 P32.1 P33.3 P34.1 P35.1 pad.0 Q3.2 R28.1 R32.2 R40.2 R41.2 R44.2 R53.2 U2.12 U3.3
  other v1: 42.8,31.2 57.2,32.2 70.9,35.6 35.2,41.5 44,42.6 56.8,42.6
NetC1_1: C1.1 R1.1 U1.10 U1.11 U1.12 U1.13 U1.14 | length 43
  Top Layer w0.25: U1.14 U1.13 U1.12 ; U1.10 U1.11 U1.12 ; v2(40.25,71.7) 39.45,71.7 39.185,71.435 U1.12 ; C1.1 v2(41,101.4) 42.4,101.4 R1.1@42.675,101.125
  Top Layer w0.35: R1.1@42.375,100.825 42.675,101.125 R1.1
  Bottom Layer w0.25: v2(40.25,71.7) 40.323,71.773 41.223,71.773 42.1,72.65 42.1,75.45 37.4,80.15 37.4,97.8 v2(41,101.4)
NetC1_2: C1.2 C2.1 R2.1 U1.15 | length 38.6
  Top Layer w0.25: U1.15 38.68,69.53 39.727,70.577 40.177,70.577 v2(40.25,70.65)
  Top Layer w0.35: C2.1 v2@41,98.15 ; C1.2 v2@41,98.15 ; R2.1 41.05,98.2 v2(41.025,98.175) v2@41,98.15
  Bottom Layer w0.25: v2(40.25,70.65) 41.25,70.65 42.6,72 42.6,75.75 38,80.35 38,95.15 v2(41.025,98.175)
NetC2_2: C2.2 C5.1 R3.1 U1.16 | length 36.4
  Top Layer w0.25: U1.16 38.895,68.895 39.6,69.6 v2(40.25,69.6)
  Top Layer w0.35: C5.1 v2@41,95.05 ; C2.2 v2@41,95.05 ; R3.1 41.05,95.1 v2(41.025,95.075) v2@41,95.05
  Bottom Layer w0.25: v2(40.25,69.6) 41.3,69.6 43.1,71.4 43.1,76.1 38.55,80.65 38.55,92.6 v2(41.025,95.075)
NetC3_1: C3.1 U1.1 | length 2.9
  Top Layer w0.25: C3.1 35.1,78.825 35.505,78.42 U1.1
NetC4_2: C4.2 U1.4 | length 2.9
  Top Layer w0.25: C4.2 35.1,76.865 35.45,76.515 U1.4
NetC5_2: C5.2 C7.1 R11.1 U1.17 | length 34
  Top Layer w0.25: U1.17 39.06,68.26 39.35,68.55 v2(40.25,68.55)
  Top Layer w0.35: C7.1 v2(41,91.95) ; C5.2 v2(41,91.95) ; R11.1 41.05,92 v2(41,91.95)
  Bottom Layer w0.25: v2(40.25,68.55) 41.2,68.55 43.6,70.95 43.6,76.4 39.1,80.9 39.1,90.05 v2(41,91.95)
NetC6_1: C6.1 U1.5 | length 3.7
  Top Layer w0.25: C6.1 35.6,75.2 36.28,75.88 U1.5
NetC6_2: C6.2 U1.6 | length 4.2
  Top Layer w0.25: C6.2 34.6,73.7 35.15,73.7 36.695,75.245 U1.6
NetC7_2: C7.2 C8.1 R12.1 U1.18 | length 31.9
  Top Layer w0.25: U1.18 39.125,67.625 39.25,67.5 v2(40.25,67.5)
  Top Layer w0.35: C8.1 v2@41,88.85 ; C7.2 v2@41,88.85 ; R12.1 41.05,88.9 v2(41.025,88.875) v2@41,88.85
  Bottom Layer w0.25: v2(40.25,67.5) 41.3,67.5 44.1,70.3 44.1,76.65 39.675,81.075 39.675,87.525 v2(41.025,88.875)
NetC8_2: C8.2 C11.1 R13.1 U1.19 | length 30.7
  Top Layer w0.25: U1.19 39.06,66.99 39.65,66.4 v2(40.25,66.4)
  Top Layer w0.35: C8.2 v2(41,85.75) ; C11.1@41.02,84.92 C11.1 v2(41,85.75) ; R13.1@42.35,85.325 42.65,85.625 R13.1 41.05,85.8 v2(41,85.75)
  Bottom Layer w0.25: v2(40.25,66.4) 41.3,66.4 44.6,69.7 44.6,76.9 40.175,81.325 40.175,84.925 v2(41,85.75)
NetC9_1: C9.1 U1.42 | length 2.4
  Top Layer w0.25: U1.42 49.76,74.61 C9.1
NetC10_1: C10.1 U1.40 | length 2.4
  Top Layer w0.25: U1.40 49.76,73.34 C10.1
NetC11_2: C11.2 R17.1 U1.20 | length 27.7
  Top Layer w0.25: U1.20 38.695,66.355 39.677,65.373 40.227,65.373 v2(40.25,65.35) ; C11.2 v2(41,82.5) 42.4,82.5 R17.1
  Top Layer w0.35: R17.1@42.3,83.175 42.6,82.875 R17.1
  Bottom Layer w0.25: v2(40.25,65.35) 41.3,65.35 45.1,69.15 45.1,77.15 41,81.25 v2(41,82.5)
NetC12_1: C12.1 K1.6 R45.1 | length 39.8
  Top Layer w0.35: K1.6 40.88,31.28 42.4,32.8 46.9,32.8 48.8,30.9 64.9,30.9 66.7,32.7 C12.1 R45.1
NetD1_1: D1.1 R10.1 U1.9 | length 6.5
  Top Layer w0.25: R10.1 34.1,69.425 34.45,69.775 34.625,69.775 35.1,70.25 D1.1 35.329,71.529 35.329,72.279 36.39,73.34 U1.9
NetD2_2: D2.2 Q1.1 R29.1 | length 73.3
  Top Layer w0.35: v1(34,60.4) 38.5,55.9 R29.1 D2.2
  Bottom Layer w0.5: Q1.1 33.474,110.326 34,109.8 v1(34,60.4)
NetD3_2: D3.2 K1.1 Q4.3 | length 7.4
  Top Layer w1: K1.1 D3.2 Q4.3
NetD5_2: D5.2 D7.1 P6.2 Q3.3 | length 33.1
  Top Layer w0.25: D7.1 22.9,40.5 23.9,39.5 Q3.3
  Top Layer w0.5: P6.2@3.5,34.5 8.5,34.5 D5.2 Q3.3
NetD6_2: D6.2 Q2.1 R43.1 | length 32.3
  Top Layer w0.35: v1(23.658,69.342) 26.658,69.342 44.3,51.7 D6.2 R43.1
  Bottom Layer w0.35: Q2.1 22.247,69.342 v1(23.658,69.342)
NetD7_2: D7.2 R38.1 | length 3.8
  Top Layer w0.25: D7.2 18.8,39.1 19,39.3 R38.1
NetD8_2: D8.2 R39.2 | length 10.8
  Top Layer w0.35: D8.2 26.3,52.5 28.4,54.6 R39.2
NetD9_2: D9.2 R47.1 | length 4.9
  Top Layer w0.35: D9.2 29.6,50.4 30.4,51.2 R47.1
NetK1_5: K1.5 R18.1 R19.1 R20.1 R21.1 R22.1 R23.1 R24.1 R25.1 R26.1 R27.1 | length 29.8
  Top Layer w1.5: K1.5 R27.1 35.812,13.087 59.088,13.087 R18.1
NetK1_7: K1.7 R32.1 | length 4.1
  Top Layer w0.35: R32.1 45.9,27.153 K1.7
NetK1_8: K1.8 R31.1 | length 5.8
  Top Layer w0.35: K1.8 R31.1
NetP10_2: P10.2 P13.1
NetP11_2: P11.2 P13.2
NetP12_2: P12.2 P13.3
NetP14_2: P14.2 P17.1
NetP15_2: P15.2 P17.2
NetP16_2: P16.2 P17.3
NetP18_2: P18.2 P20.1 | length 72
  Top Layer w2.5: P18.2@95.586,87.9 95.978,87.9 96.178,88.1 126,88.1 131,88.1 P20.1@131.5,88.1
  Bottom Layer w2.5: P18.2@95.586,87.9 95.978,87.9 96.178,88.1 126,88.1 131,88.1 P20.1@131.5,88.1
NetP19_2: P19.2 P20.2 | length 76.6
  Top Layer w2.5: 95.5,98.4 104.9,98.4 111.7,91.6 126,91.6 P20.2@131,91.6
  Bottom Layer w2.5: 95.5,98.4 104.9,98.4 111.7,91.6 126,91.6 P20.2@131,91.6
NetP20_3: P20.3 P22.2 | length 80.8
  Top Layer w2.5: 95.5,107.1 102.8,107.1 114.8,95.1 126,95.1 P20.3@131,95.1
  Bottom Layer w2.5: 95.6,107.1 102.8,107.1 114.8,95.1 126,95.1 P20.3@131,95.1
NetP33_2: P33.2 U3.2 | length 16.8
  Top Layer w0.35: U3.2 68,62.654 P33.2
NetQ3_1: Q3.1 R42.2 R44.1 | length 4.3
  Top Layer w0.35: Q3.1 26.25,33.6 R44.1 R42.2
NetR14_2: R14.2 U1.26 | length 2.3
  Top Layer w0.25: U1.26 R14.2
NetR15_2: R15.2 U1.27 | length 4.4
  Top Layer w0.25: R15.2 46.125,64.575 46.635,65.085 U1.27
NetR16_1: R16.1 U1.35 | length 2.5
  Top Layer w0.25: U1.35 48.935,70.165 49.122,69.978 49.722,69.978 R16.1
NetR33_2: R33.2 R35.1 R37.1 U2.11 | length 8.9
  Top Layer w0.35: U2.11 60,41.5 R37.1@60.1,41.4 ; R37.1@60.1,41.525 R37.1 60.075,43.375 R35.1 R33.2
NetR34_2: R34.2 R41.1 U2.8 | length 4.4
  Top Layer w0.35: U2.8 55.315,37.69 55.2,37.575 R34.2 R41.1
NetR35_2: R35.2 R59.1 R60.2 U2.13 | length 9.9
  Top Layer w0.35: U2.13 56.674,44.04 57.114,43.6 58.05,43.6 R35.2 58.37,43.52 58.37,44.67 59.7,46 R59.1 ; R59.1@59.75,46.95 R59.1 ; R60.2 R59.1
NetR45_2: R45.2 R46.1 U2.9 | length 8.8
  Top Layer w0.35: U2.9 56.94,38.96 58,37.9 58,36.8 59.2,35.6 R45.2 R46.1
NetR54_2: R54.2 R55.1 U2.5 | length 5
  Top Layer w0.35: R55.1 R54.2 49.845,40.2 U2.5
NetR56_2: R56.2 R57.1 U2.7 | length 4
  Top Layer w0.35: U2.7 49.9,37.665 R56.2 R57.1
NetR58_1: R58.1 U3.6 | length 7.2
  Top Layer w0.35: R58.1@60.775,123.3 60.775,123.125 60.95,123.3 62,123.3 63.328,121.972 U3.6
V_BATT_A: P5.2 Q1.4 R28.2 R56.1 U2.4 | length 126.1
  Top Layer w0.35: P5.2 5.958,90.742 12,84.7 25,84.7 26.4,83.3 26.4,80.3 13.5,67.4 13.5,57 26.5,44 38.3,44 39.6,42.7 v1(39.6,41.5) R28.2 ; U2.4 v1(51.2,41.5) 51.75,40.95 R56.1
  Bottom Layer w0.35: v1(39.6,41.5) v1(51.2,41.5)
V_BATT_B: P7.2 Q2.4 R40.1 R54.1 U2.6 | length 71.1
  Top Layer w0.35: P7.2 5.934,62.866 31,37.8 R40.1 37.8,37.8 38.35,38.35 R54.1 48.05,38.35 48.66,38.96 U2.6
V_REF: D4.1 R30.1 U2.10 | length 7.1
  Top Layer w0.35: U2.10 57.77,40.23 58.5,39.5 R30.1 59.8,39.2 D4.1
VBUS: P4.2 P10.1 P11.1 P12.1 P14.1 P15.1 P16.1 R18.2 R19.2 R20.2 R21.2 R22.2 R23.2 R24.2 R25.2 R26.2 R27.2 | length 11.3
  Top Layer w1: v1(35.8,9) R27.2 ; v1(38.4,9) R26.2 ; v1(41,9) R25.2 ; v1(43.6,9) R24.2 ; v1(46.2,9) R23.2 ; v1(48.7,9) 48.7,10.125 48.725,10.15 R22.2 ; v1(51.3,9) R21.2 ; v1(53.9,9) R20.2 ; v1(56.5,9) R19.2 ; v1(59.1,9) R18.2
VLOG: R14.1 R15.1 R16.2 U1.32 | length 12.2
  Top Layer w0.25: U1.32 48.94,68.26 49.121,68.079 49.771,68.079 R16.2 R14.1 50.95,66.3 51.2,66.05 51.2,62.75 50.4,61.95 R15.1
pads on no net: K1.4 R53.0 U1.2 U1.7 U1.8 U1.25 U1.28 U1.29 U1.31 U1.38 U1.39 U1.43 U1.44 U1.45 U1.47 U1.48

## Polygon pours and split planes (outlines as drawn)
GND on Top Layer "Top Layer-GND" (solid, pour order 4): 135,5 cw(c130,5) 130,0 5,0 cw(c5,5) 0,5 0,150 cw(c5,150) 5,155 130,155 cw(c130,150) 135,150
BATT- on Top Layer "Top Layer-BATT-" (solid, pour order 2): 11.1,139.9 10.4,140.6 0.05,140.6 0.05,144.2 11.85,144.2 14.55,141.5 43.3,141.5 50,134.8 50,60.3 49.05,59.35 38.8,59.35 28.05,70.1 28.05,83.6 25.9,85.75 13.35,85.75 11.1,88
GND on Bottom Layer "Bottom Layer-GND" (solid, pour order 1): 0,5 0,150 cw(c5,150) 5,155 130,155 cw(c130,150) 135,150 135,5 cw(c130,5) 130,0 5,0 cw(c5,5)

## Other copper
Top Layer:
  region net VBUS: 30.3,16 34.8,11.5 67.7,11.5 76.8,20.6 76.8,80 78.1,81.3 86,81.3 87.6,79.7 87.6,0.3 9.5,0.3 9.5,14.5 11,16
  region net DGND: 70,115.1 68.1,117 68.1,121.9 70,123.8 100.1,123.8 111.9,112 133,112 133,100.4 114.1,100.4 97.5,117 76.5,117 74.6,115.1
  region net NetP12_2: 90.7,70.5 90.7,83.7 112.5,83.7 112.5,70.5
  region net NetP11_2: 90.7,57.6 90.7,69.9 124.5,69.9 124.5,57.6
  region net NetP10_2: 90.7,43.7 90.7,57.1 112.5,57.1 112.5,43.7
  region net NetP16_2: 90.7,28.7 90.7,41.9 112.5,41.9 112.5,28.7
  region net NetP15_2: 90.7,15.8 90.7,28.1 124.6,28.1 124.6,15.8
  region net NetP14_2: 90.7,2.3 90.7,15.3 112.5,15.3 112.5,2.3
  region net +12: 54,121 52.5,119.5 52.5,93.4 60.4,85.5 86.5,85.5 87.6,86.6 87.6,108.1 91.6,112.1 94.3,112.1 95.3,113.1 95.3,116.1 76.8,116.1 75.1,114.4 61.7,114.4 59,117.1 59,119.5 57.5,121
  region net 24V: 61.1,54.9 64.5,51.5 66.3,51.5 66.7,51.9 66.7,61.7 66.3,62.1 62.9,62.1 59,66 59,69 58,70 53.5,70 52.5,69 52.5,63.5
Bottom Layer:
  region net DGND: 70,115.1 68.1,117 68.1,121.9 70,123.8 100.1,123.8 111.9,112 133,112 133,100.4 114.1,100.4 99.4,115.1 74.6,115.1
  region net +12: 57.5,121 54,121 52.5,119.5 52.5,108.1 54.7,105.9 54.7,91.2 60.9,85 86,85 87.6,86.6 87.6,112.9 86.1,114.4 61.7,114.4 59,117.1 59,119.5
  region net NetP12_2: 90.7,70.5 90.7,83.7 112.5,83.7 112.5,70.5
  region net NetP11_2: 90.7,57.6 90.7,69.9 124.5,69.9 124.5,57.6
  region net NetP10_2: 90.7,43.7 90.7,57.1 112.5,57.1 112.5,43.7
  region net NetP15_2: 90.7,15.8 90.7,28.1 124.6,28.1 124.6,15.8
  region net NetP16_2: 90.7,28.7 90.7,41.9 112.5,41.9 112.5,28.7
  region net NetP14_2: 90.7,0.2 90.7,15.3 112.5,15.3 112.5,0.2
  region net VBUS: 9.5,0.3 9.5,14.5 11,16 72.2,16 76.8,20.6 76.8,80 78.1,81.3 86,81.3 87.6,79.7 87.6,0.3
  region net 24V: 30.4,56 33.8,59.4 49,59.4 52.5,62.9 52.5,69 53.5,70 58,70 59,69 59,60 51.9,52.9 36.7,52.9 33,49.2 33,18 32,17 12.5,17 11.5,18 11.5,35.4 10,36.9 0.2,36.9 0.2,56
  region net V_BATT_B: 0.2,86.5 23.9,86.5 23.9,72.5 0.2,72.5
  region net BATT+: 24.1,109.5 24.1,87.9 24.7,87.3 24.7,66.5 24,65.8 22.1,65.8 21.4,66.5 21.4,71.7 0.2,71.7 0.2,56.6 30.1,56.6 33,59.5 33,109.5
  region net V_BATT_A: 0.2,116 22.9,116 22.9,100.9 0.2,100.9

## Silkscreen, mask and mechanical layers (free items; w line width, h text height)
Top Overlay:
  lines w0.2: 11.5,32 11.5,30.5 17.4,30.5 17.4,42 11.5,42 ; 11.5,40.5 11.5,42 ; 28.1,47.2 28.1,60.7 ; 117.5,108.3 117.5,112.2 123.1,112.2 ; 117.6,90 117.6,85.6 123,85.6 ; 11.5,42 11.5,42 ; 25,47.2 25,60.7 31.2,60.7 31.2,47.2 25,47.2
  text "#8" at 7.9,152.6 h1.27
  text "#8" at 128.6,144.2 h1.27
  text "V-" at 11.3,142.2 h1.27 r310
  text "SNS" at 11.2,139.1 h1.27 r310
  text "V+" at 11.3,135.1 h1.27 r310
  text "POWER MONITOR" at 0.4,130.6 h1.27
  text "E-STOP" at 122.2,118.1 h1.27 r90
  text "GND" at 122.2,104.5 h1.27 r90
  text "ISOLATED POWER" at 118.4,90.4 h1.27 r90
  text "+12V" at 122.3,89.1 h1.27 r90
  text "BATT B :" at 25.5,60.2 h1.27 r270
  text "BATT A :" at 28.8,60.2 h1.27 r270
  text "CONTACTOR / COIL" at 11.9,42 h1.2 r270
  text "#8" at 128.5,8.9 h1.27
  text "#8" at 0.8,8.8 h1.27
Top Solder:
  lines w4: 25.433,91.833 25.6,92 ; 40.8,148.4 46.1,143.1 129.9,143.1
  lines w4.25: 18.939,91.833 25.433,91.833 ; 18.963,120.867 25.467,120.867 40.8,136.2 40.8,138.24 ; 25.6,92 25.6,120.867
Bottom Solder:
  lines w2.5: 81.9,9.6 82.5,10.2 82.5,78.009 ; 95.917,76.383 105.949,76.383 ; 96.017,50.983 105.949,50.983 ; 96.064,9.2 106,9.2 ; 96.2,34.6 106,34.6 ; 96.283,63.683 118.954,63.683 ; 96.4,21.9 119.005,21.9
  lines w4: 5.9,50.1 28.705,27.295 28.705,22.3 ; 5.934,79.133 14.067,79.133 ; 5.958,108.167 16.067,108.167 ; 15.7,9.6 81.9,9.6 ; 18.905,62.8 26.1,62.8 29.4,66.1 29.4,106.6 ; 40.8,148.4 40.9,148.4 46.2,143.1 130,143.1
Mechanical 1:
  the board outline again, w0.127

## Dimensions
-2.2,0 to -0.4,155 on Mechanical 1
135,-0.2 to 0,-0.4 on Mechanical 1